# Altium PCB ESP32-C3 DEV-M-1.PcbDoc
Units mil, origin at the board's own origin, x right, y up, seen from the top; angles counter-clockwise.
Board outline 1550 x 1000 mil, 2 copper layers (Top Layer, Bottom Layer), stack 38.548 mil thick; 61 components, 45 nets, 260 pads, 137 vias.
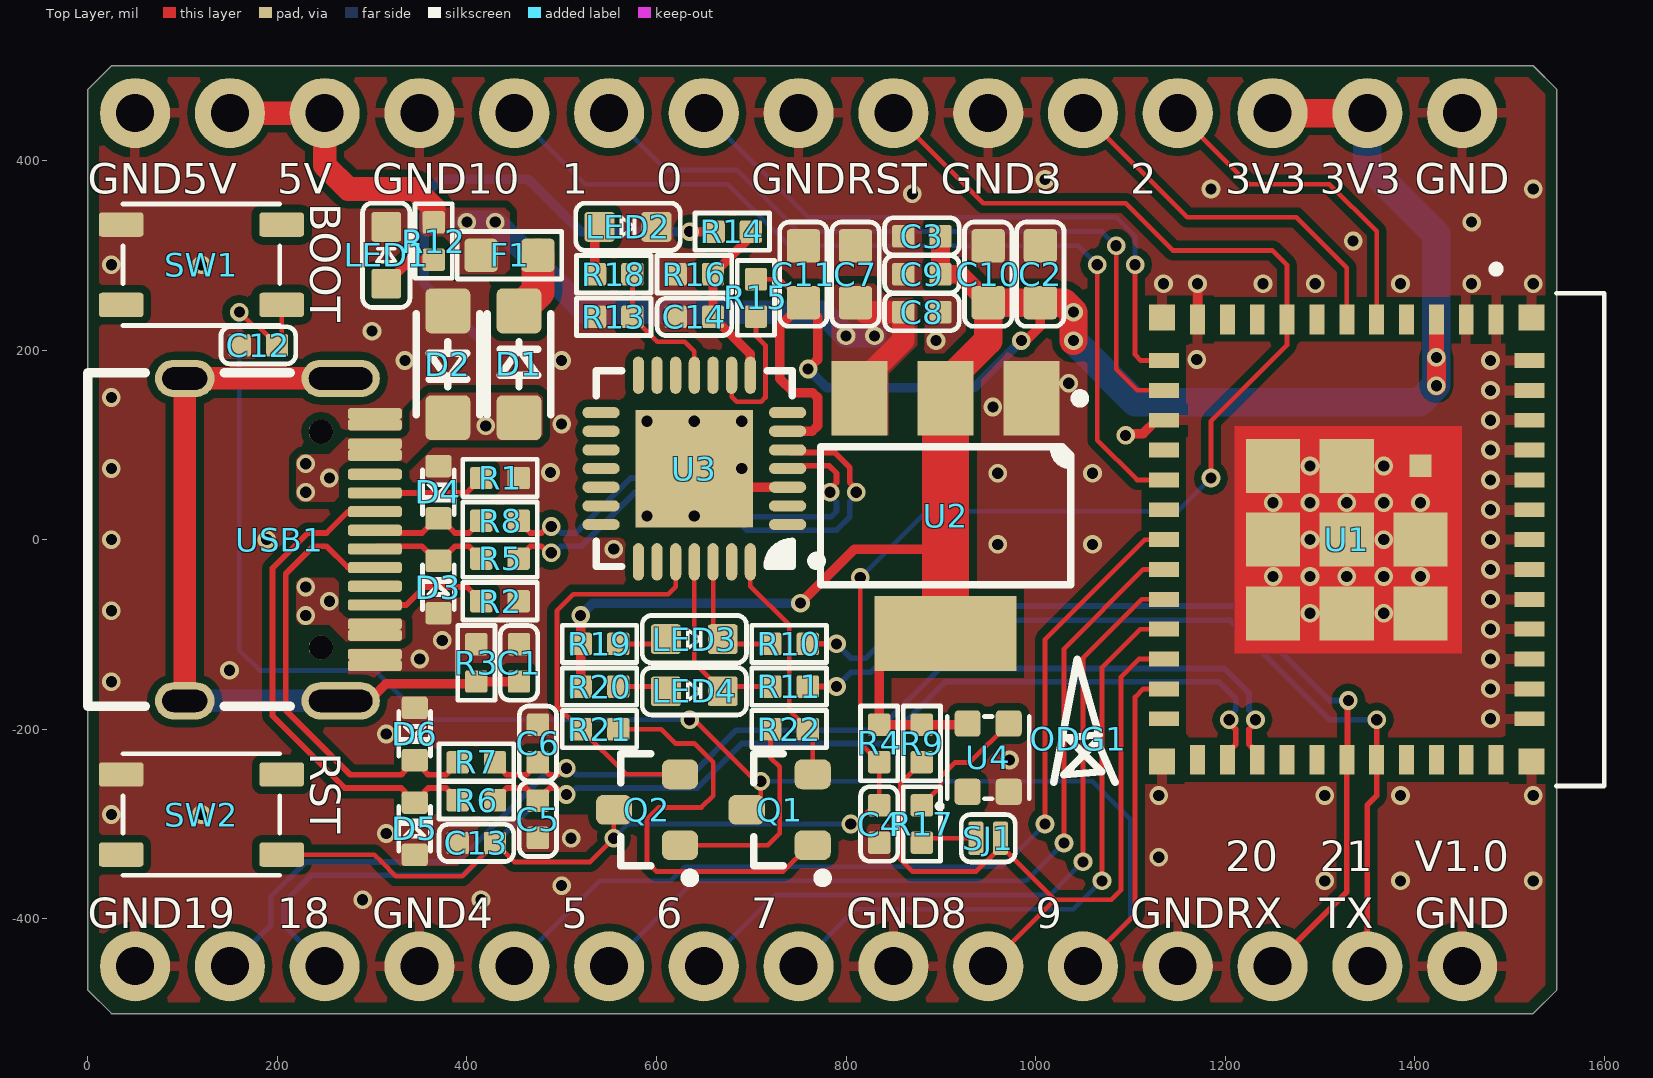
[diagram p0: Top Layer view]
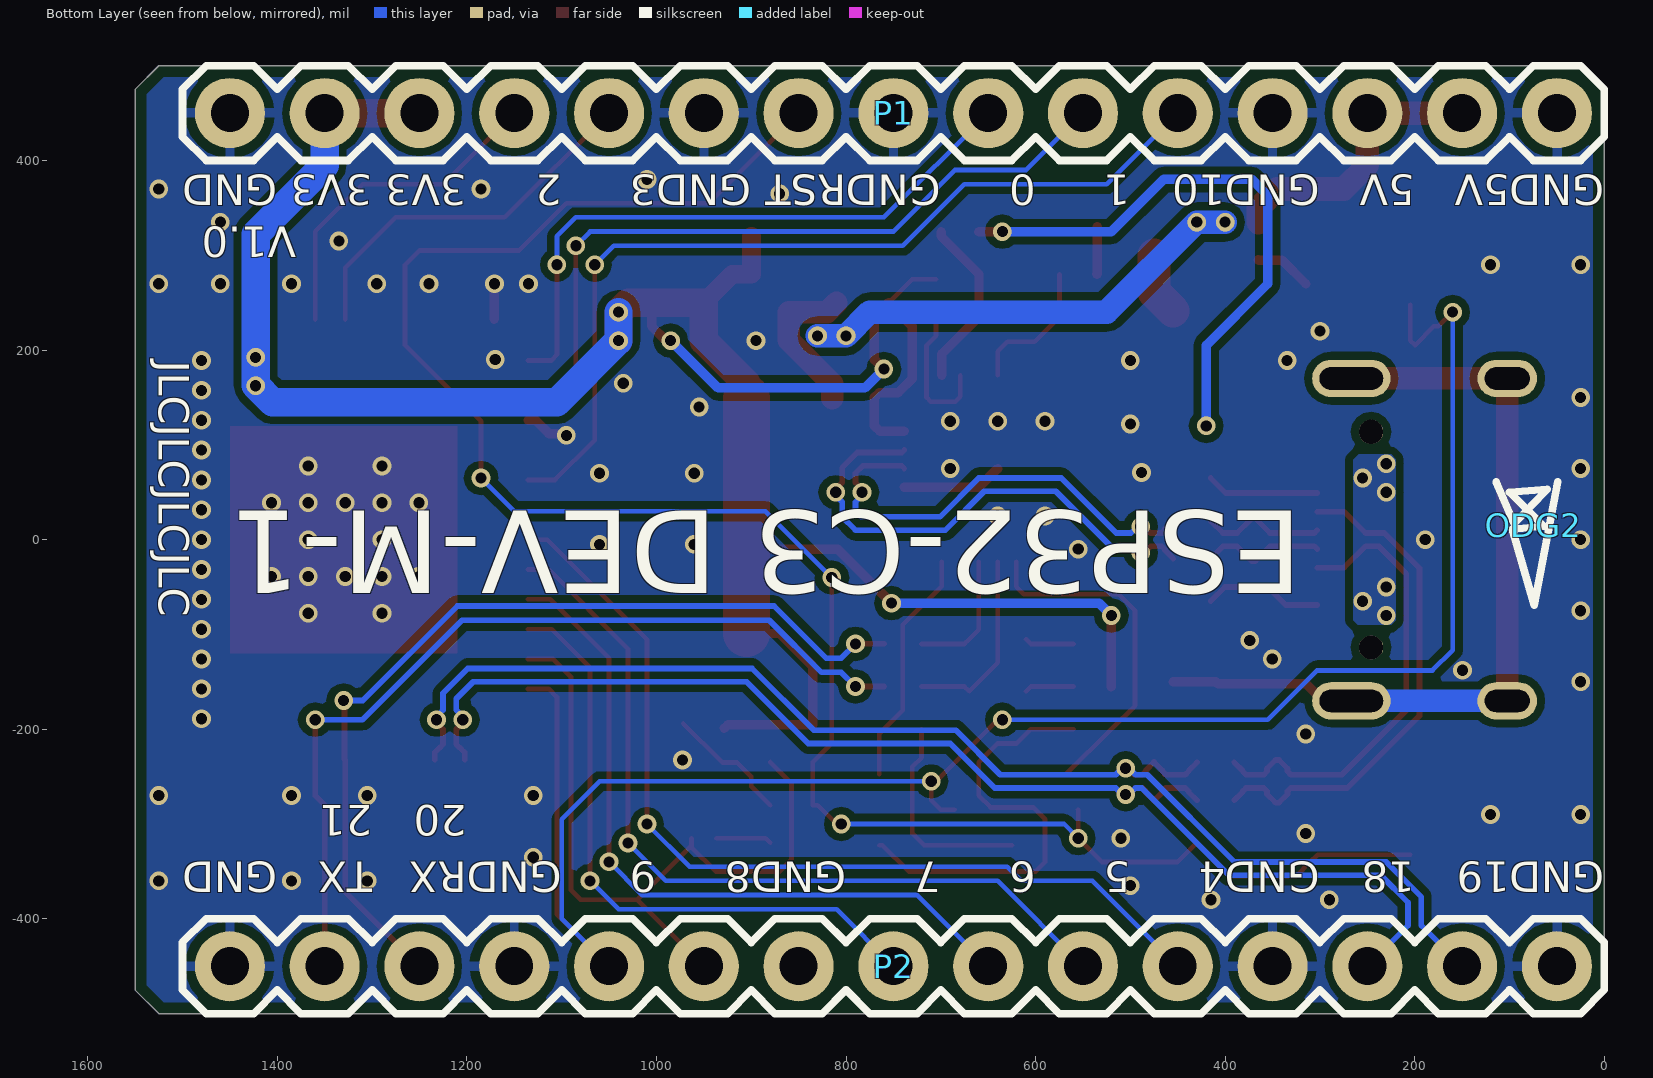
[diagram p1: Bottom Layer view, seen from below]

## Layer stack, top to bottom
Top Solder: solder mask 0.4, Solder Resist, Dk 3.5
Top Layer: signal copper 1.4
Dielectric 1: dielectric 35.748, FR-4, Dk 4.8
Bottom Layer: signal copper 1.4
Bottom Solder: solder mask 0.4, Solder Resist, Dk 3.5

## Board outline
0,-475 25,-500 1525,-500 1550,-475 1550,475 1525,500 25,500 0,475

## Design rules (kind name [scope] priority, off if disabled: settings)
BoardOutlineClearance [All] p1: gap=0 ignorepadtopadclearanceinfootprint=FALSE except(11.81: Poly-OutlineEdge Poly-CavityEdge Poly-CutoutEdge Poly-SplitBarrior Poly-SplitContinuation)
Clearance [All] p1: gap=8 ignorepadtopadclearanceinfootprint=FALSE except(0: Arc-Hole Track-Hole SMDPad-Hole THPad-Hole Via-Hole Fill-Hole Poly-Hole Region-Hole Text-Hole; 5: Arc-Arc Arc-Track Arc-SMDPad Arc-THPad Arc-Text Track-Track Track-SMDPad Track-THPad Track-Text SMDPad-SMDPad SMDPad-THPad SMDPad-Text THPad-THPad THPad-Text Via-Text Fill-Text Poly-Text Region-Text Text-Text; 7: Arc-Via Track-Via)
DiffPairsRouting [All] p1: maxlimit=100 minlimit=8 mostfreqgap=8 toplayer_minwidth=6 toplayer_maxwidth=6 toplayer_prefwidth=6 bottomlayer_minwidth=6 bottomlayer_maxwidth=6 bottomlayer_prefwidth=6 maxuncoupledlength=500
HoleSize [All] p1: absolutevalues=TRUE maxlimit=196.85 minlimit=11.81 maxpercent=80.000 minpercent=20.000
MinimumSolderMaskSliver [All] p1: minsoldermaskwidth=0
PlaneClearance [All] p1: clearance=10
PlaneConnect [All] p1: planeconnectstyle=Direct reliefexpansion=20 reliefentries=4 reliefconductorwidth=10 reliefairgap=10
PolygonConnect PolygonConnect_ESP [HasFootprint('XCVR_ESP32-C3-MINI-1U-N4')] p1: connectstyle=Relief reliefconductorwidth=10 reliefentries=4 polygonreliefangle="90 Angle" airgapwidth=10
PolygonConnect [All] p2: thpad.connectstyle=Relief thpad.reliefconductorwidth=10 thpad.reliefentries=4 thpad.polygonreliefangle="90 Angle" thpad.airgapwidth=10 smdpad.connectstyle=Direct smdpad.reliefconductorwidth=10 smdpad.reliefentries=4 smdpad.polygonreliefangle="90 Angle" smdpad.airgapwidth=10 via.connectstyle=Direct via.reliefconductorwidth=10 via.reliefentries=4 via.polygonreliefangle="90 Angle" via.airgapwidth=10
RoutingVias [All] p1: holewidth=11.81 width=19.68 viastyle="Through Hole" minholewidth=11.81 minwidth=19.68 maxholewidth=196.85 maxwidth=208.66
SilkToSilkClearance [All] p1: silktosilkclearance=0
SilkToSolderMaskClearance [IsPad] p1: minsilkscreentomaskgap=0 clearancetoexposedcopper=TRUE
SolderMaskExpansion [All] p1: expansion=2
Width [All] p1: maxlimit=100 minlimit=5 preferedwidth=5
23 further rules are at their usual default settings.

## Classes and differential pairs
differential pair USB2: +USB2_P -USB2_N
differential pair USB1: +USB1_P -USB1_N
differential pair Bx: +Bx_P -Bx_N
differential pair Ax: +Ax_P -Ax_N

## Components (designator, comment, footprint, x,y, rotation, side; value= is the part's Value field where it differs from the comment)
C1 "4.7nF" C0402 455,-130 r90 top
C2 "10uF/10V(10%)" C0603 1005,280 r270 top
C3 "1uF/16V(10%)" C0402 880,320 r0 top
C4 "1uF/16V(10%)" C0402 835,-300 r90 top
C5 "22pF/50V(5%)" C0402 475,-295 r90 top
C6 "22pF/50V(5%)" C0402 475,-215 r270 top
C7 "10uF/10V(10%)" C0603 810,280 r270 top
C8 "0.1uF/50V(10%)" C0402 880,240 r180 top
C9 "0.1uF/50V(10%)" C0402 880,280 r0 top
C10 "10uF/10V(10%)" C0603 950,280 r270 top
C11 "10uF/10V(10%)" C0603 755,280 r270 top
C12 "0.1uF/50V(10%)" C0402 180,205 r180 top
C13 "0.1uF/50V(10%)" C0402 410,-320 r180 top
C14 "1uF/16V(10%)" C0402 640,235 r0 top
D1 "DSK16" SOD123F 455,185 r90 top
D2 "SMF5.0A" SOD123F 380,185 r270 top
D3 "ESD5B5.05T1G" SOD-523 370,-50 r90 top
D4 "ESD5B5.05T1G" SOD-523 370,50 r270 top
D5 "ESD5B5.05T1G" SOD-523 345,-305 r90 top
D6 "ESD5B5.05T1G" SOD-523 345,-205 r270 top
F1 "6V/0.5A/1A" FUSE0603_0.5MM 445,300 r180 top
LED1 "LED" LED0603_RED 315,300 r90 top value=color?
LED2 "LED" LED0603_RED 570,330 r0 top value=color?
LED3 "LED" LED0603_RED 640,-105 r0 top value=color?
LED4 "LED" LED0603_RED 640,-160 r0 top value=color?
ODG1 "ODG_LOGO" ODG_LOGO 1045,-210 r0 top
ODG2 "ODG_LOGO" ODG_LOGO 75,15 r0 bottom
P1 "CONN_X15" 2.54MM_MALE_X15 1450,450 r180 bottom
P2 "CONN_X15" 2.54MM_MALE_X15 1450,-450 r180 bottom
Q1 "S8050" "INFINEON SOT-23-3" 730,-285 r180 top
Q2 "S8050" "INFINEON SOT-23-3" 590,-285 r180 top
R1 "5.1K(1%)" R0402 435,65 r180 top
R2 "5.1K(1%)" R0402 435,-65 r0 top
R3 "1M" R0402 410,-130 r90 top
R4 "10K(1%)" R0402 835,-215 r90 top
R5 "22R(1%)" R0402 435,-20 r180 top
R6 "22R(1%)" R0402 410,-275 r180 top
R7 "22R(1%)" R0402 410,-235 r180 top
R8 "22R(1%)" R0402 435,20 r180 top
R9 "10K(1%)" R0402 880,-215 r90 top
R10 "22R(1%)" R0402 740,-110 r180 top
R11 "22R(1%)" R0402 740,-155 r180 top
R12 "5.1K(1%)" R0402 365,315 r90 top
R13 "10K(1%)(NC)" R0402 555,235 r0 top
R14 "22K(1%)" R0402 680,325 r180 top
R15 "1K(1%)" R0402 705,255 r270 top
R16 "47K(1%)" R0402 640,280 r0 top
R17 "0R(1%)" R0402 880,-300 r90 top
R18 "3.3K(1%)" R0402 555,280 r0 top
R19 "3.3K(1%)" R0402 540,-110 r180 top
R20 "3.3K(1%)" R0402 540,-155 r180 top
R21 "5.1K(1%)" R0402 540,-200 r180 top
R22 "5.1K(1%)" R0402 740,-200 r180 top
SJ1 "SJ_2P" SJ_2P_MINI 950,-315 r0 top
SW1 "Button-4P" SWITCH_3X4X2.5_4PIN_SMD 120,290 r0 top
SW2 "Button-4P" SWITCH_3X4X2.5_4PIN_SMD 120,-290 r0 top
U1 "ESP32-C3-MINI-1U-N4 (A)" XCVR_ESP32-C3-MINI-1U-N4 1328.35,0 r270 top locked
U2 "AMS1117-3.3" "TI SOT-223 DCY" 905,25 r270 top
U3 "CP2102-GMR" QFN-28_EP 640,75 r180 top locked value=Value
U4 "WS2812" WS2812_2020 950,-230 r90 top
USB1 "Type-C" Type-C-TOP 0,0 r180 top locked

## Footprints (in the part's own frame and the unit in brackets; to place one, negate y for a bottom-side part, rotate by r counter-clockwise, add the part's x,y. Pads: shape width x height; smd on the part's side, far side on the other; paste and mask are expansions set on the pad)
2.54MM_MALE_X15 [mil]
  round 74 hole 40: 1(0,0) 2(100,0) 3(200,0) 4(300,0) 5(400,0) 6(500,0) 7(600,0) 8(700,0) 9(800,0) 10(900,0) 11(1000,0) 12(1100,0) 13(1200,0) 14(1300,0) 15(1400,0)
  silkscreen extent -50,-50 1450,50
C0402 [mm]
  rrect20% 0.6x0.6 smd: 1(-0.5,0) 2(0.5,0)
  silkscreen extent -1,-0.5 1,0.5, body extent -0.5,-0.26 0.5,0.26, height 0.52
C0603 [mil]
  rrect20% 35x35 smd: 1(-30,0) 2(30,0)
  silkscreen extent -55,-25 55,25, body extent -31,-16 32,16, height 32
FUSE0603_0.5MM [mil]
  rrect25% 35x35 smd: 1(-30,0) 2(30,0)
  silkscreen extent -55,-25 55,25, body extent -30,-17 30,17, height 23
"INFINEON SOT-23-3" [mm] "SOT23, 3-Leads, Body 2.90x2.40mm, Pitch 0.95mm, IPC Medium Density"
  rrect50% 0.972x0.802 smd: 1(-0.885,0.95) 2(-0.885,-0.95) 3(0.885,0)
  silkscreen extent -1.28,-1.5 0.7,1.95, body extent -1.16,-1.45 1.16,1.45, height 1
LED0603_RED [mm] "Chip Diode, 2-Leads, Body 1.60x0.80mm, IPC Medium Density"
  rrect20% 0.8x0.8 smd: 1(-0.762,0) 2(0.762,0)
  silkscreen extent -1.4,-0.64 1.4,0.64, body extent -0.8,-0.4 0.8,0.4, height 0.53
ODG_LOGO [mil]
  silkscreen extent -26,-46 39,84
QFN-28_EP [mm]
  oval 1x0.3 smd: 1(-2.5,1.5) 2(-2.5,1) 3(-2.5,0.5) 4(-2.5,0) 5(-2.5,-0.5) 6(-2.5,-1) 7(-2.5,-1.5) 15(2.5,-1.5) 16(2.5,-1) 17(2.5,-0.5) 18(2.5,0) 19(2.5,0.5) 20(2.5,1) 21(2.5,1.5)
  oval 0.3x1 smd: 8(-1.5,-2.5) 9(-1,-2.5) 10(-0.5,-2.5) 11(0,-2.5) 12(0.5,-2.5) 13(1,-2.5) 14(1.5,-2.5) 22(1.5,2.5) 23(1,2.5) 24(0.5,2.5) 25(0,2.5) 26(-0.5,2.5) 27(-1,2.5) 28(-1.5,2.5)
  rect 3.15x3.15 smd: 29(0,0)
  silkscreen extent -3.4,-2.63 2.63,2.63, body extent -2.5,-2.5 2.5,2.5, height 1
R0402 [mm]
  rrect20% 0.6x0.6 smd: 1(-0.5,0) 2(0.5,0)
  silkscreen extent -1,-0.5 1,0.5, body extent -0.5,-0.25 0.5,0.25, height 0.35
SJ_2P_MINI [mil]
  rrect30% 16x35 smd: 1(-13,0) 2(13,0)
  silkscreen extent -28,-25 28,25
SOD123F [mm] "SODFL, 2-Leads, Body 1.60x3.50mm, IPC Medium Density"
  rrect25% 1.2x1.2 smd: 1(-1.43,0) 2(1.43,0)
  silkscreen extent -1.35,-0.85 1.35,0.85, body extent -1.75,-0.8 1.75,0.8, height 1.1
SOD-523 [mm]
  rrect25% 0.6x0.7 smd: 1(-0.7,0) 2(0.7,0)
  silkscreen extent -0.6,-0.43 0.6,0.43, body extent -0.8,-0.4 0.8,0.4, height 0.82
SWITCH_3X4X2.5_4PIN_SMD [mm]
  rrect25% 1.2x0.65 smd: 1(-2.15,1.075) 2(2.15,1.075) 3(-2.15,-1.075) 4(2.15,-1.075)
  silkscreen extent -2.1,-1.63 2.1,1.63, body extent -2.55,-1.6 2.55,1.6, height 2.5
"TI SOT-223 DCY" [mm] "SOT223, 4-Leads, Body 6.50x7.00mm (avg), Pitch 2.30mm, IPC Medium Density"
  rect 2x1.5 smd: 1(-3.15,2.3) 2(-3.15,0) 3(-3.15,-2.3)
  rect 2x3.8 smd: 4(3.15,0)
  silkscreen extent -3.27,-3.35 1.85,3.73, body extent -3.52,-3.25 3.5,3.25, height 1.8
Type-C-TOP [mm]
  round 0.65 hole 0.65: 0(-6.25,-2.89) 0(-6.25,2.89)
  oval 1.6x1 hole 0.6 slot 1.2 at 0 deg: 1(-2.6,4.32) 2(-2.6,-4.32)
  oval 2.1x1 hole 0.6 slot 1.7 at 0 deg: 3(-6.78,-4.32) 4(-6.78,4.32)
  rrect50% 1.45x0.3 smd: A1(-7.695,-3.375) A4(-7.695,-2.562) A5(-7.695,-1.25) A6(-7.695,-0.25) A7(-7.695,0.25) A8(-7.695,1.25) A9(-7.695,2.562) A12(-7.695,3.375) B1(-7.695,3.075) B4(-7.695,2.262) B5(-7.695,1.75) B6(-7.695,0.75) B7(-7.695,-0.75) B8(-7.695,-1.75) B9(-7.695,-2.262) B12(-7.695,-3.075)
  silkscreen extent -5.43,-4.47 0,4.47, body extent -7.9,-4.47 0,4.47, height 3.16
WS2812_2020 [mm]
  rrect30% 0.7x0.7 smd: 1(-0.915,0.55) 2(-0.915,-0.55) 3(0.915,-0.55) 4(0.915,0.55)
  silkscreen extent -1.37,-1.1 1.1,1.37, body extent -1.1,-1 1.1,1, height 0.56
XCVR_ESP32-C3-MINI-1U-N4 [mm]
  rect 0.8x0.4 smd: 1(-5.9,4) 2(-5.9,3.2) 3(-5.9,2.4) 4(-5.9,1.6) 5(-5.9,0.8) 6(-5.9,0) 7(-5.9,-0.8) 8(-5.9,-1.6) 9(-5.9,-2.4) 10(-5.9,-3.2) 11(-5.9,-4) 25(5.9,-4) 26(5.9,-3.2) 27(5.9,-2.4) 28(5.9,-1.6) 29(5.9,-0.8) 30(5.9,0) 31(5.9,0.8) 32(5.9,1.6) 33(5.9,2.4) 34(5.9,3.2) 35(5.9,4)
  rect 0.4x0.8 smd: 12(-4.8,-4.9) 13(-4,-4.9) 14(-3.2,-4.9) 15(-2.4,-4.9) 16(-1.6,-4.9) 17(-0.8,-4.9) 18(0,-4.9) 19(0.8,-4.9) 20(1.6,-4.9) 21(2.4,-4.9) 22(3.2,-4.9) 23(4,-4.9) 24(4.8,-4.9) 36(4.8,4.9) 37(4,4.9) 38(3.2,4.9) 39(2.4,4.9) 40(1.6,4.9) 41(0.8,4.9) 42(0,4.9) 43(-0.8,4.9) 44(-1.6,4.9) 45(-2.4,4.9) 46(-3.2,4.9) 47(-4,4.9) 48(-4.8,4.9)
  rect 0.6x0.6 smd paste-1 mask+0: 49(-1.975,1.975)
  rect 1.45x1.45 smd: 49(-1.975,0) 49(-1.975,-1.975) 49(0,1.975) 49(0,0) 49(0,-1.975) 49(1.975,1.975) 49(1.975,0) 49(1.975,-1.975)
  rect 0.7x0.7 smd: 50(-5.95,4.95) 51(-5.95,-4.95) 52(5.95,-4.95) 53(5.95,4.95)
  Top Layer region: -1.25,1.25 -2.7,1.25 -2.7,2.1 -2.1,2.7 -1.25,2.7
  silkscreen extent -7.35,3.9 6.6,6.9, body extent -6.6,-5.62 6.6,6.89, height 2.55

## Part data
C1 C2 C3 C4 C5 C6 C7 C8 C9 C10 C11 C12 C13 C14: library part CAP, "Capacitor"
D1: library part DIODE, "二极管"
D2: library part TVS_U, "极性：Unidirectional", Package="DFN1006L Taiwan Semiconductor", Check_prices=https://www.snapeda.com/parts/TESD5V0L1UC%20RJG/Taiwan+Semiconductor/view-part/?ref=eda, Digi-Key_Part_Number=TESD5V0L1UCRJGTR-ND, MF="Taiwan Semiconductor Corporation", MP="TESD5V0L1UC RJG", Purchase-URL="https://pricing.snapeda.com/search/part/TESD5V0L1UC RJG/?ref=eda", SnapEDA_Link=https://www.snapeda.com/parts/TESD5V0L1UC%20RJG/Taiwan+Semiconductor/view-part/?ref=snap
D3 D4 D5 D6: library part TVS_BI, "极性：Bidirectional", Package="DFN1006L Taiwan Semiconductor", Check_prices=https://www.snapeda.com/parts/TESD5V0L1UC%20RJG/Taiwan+Semiconductor/view-part/?ref=eda, Digi-Key_Part_Number=TESD5V0L1UCRJGTR-ND, MF="Taiwan Semiconductor Corporation", MP="TESD5V0L1UC RJG", Purchase-URL="https://pricing.snapeda.com/search/part/TESD5V0L1UC RJG/?ref=eda", SnapEDA_Link=https://www.snapeda.com/parts/TESD5V0L1UC%20RJG/Taiwan+Semiconductor/view-part/?ref=snap
F1: library part FUSE, "贴片自恢复保险丝"
Q1 Q2: library part NPN, "NPN型"
R1 R2 R3 R4 R5 R6 R7 R8 R9 R10 R11 R12 R13 R14 R15 R16 R17 R18 R19 R20 R21 R22: library part RES, "Resistor"
SJ1: "焊接跳线"
SW1 SW2: "Button"
U1: "Bluetooth, WiFi 802.11b/g/n, Bluetooth v5.0 Transceiver Module 2.412GHz ~ 2.484GHz Antenna Not Included, I-PEX Rev3 Surface Mount", Package=None, Check_prices=https://www.snapeda.com/parts/ESP32-C3-MINI-1U-N4/Espressif+Systems/view-part/?ref=eda, Digi-Key_Part_Number=1965-ESP32-C3-MINI-1U-N4TR-ND, MF="Espressif Systems", MP=ESP32-C3-MINI-1U-N4, Purchase-URL=https://pricing.snapeda.com/search/part/ESP32-C3-MINI-1U-N4/?ref=eda, SnapEDA_Link=https://www.snapeda.com/parts/ESP32-C3-MINI-1U-N4/Espressif+Systems/view-part/?ref=snap
U2: library part AMS1117, "线性稳压芯片"
U3: library part "CP2102 QFN28 (A)", "USBתTTL", PART NUMBER=CP2102, MFG #1="SILICON LABS", PART DESC="SINGLE-CHIP USB TO UART BRIDGE, QFN28, RoHS.", RefDes=RefDes, Type=DEV
USB1: library part USB-Type-C_16P

## Via types
v1: diameter 19.68, hole 11.81, Top Layer to Bottom Layer, tented both sides, 137 vias

## Nets (pads, with @x,y where several pads share a name; then routed paths per layer and width w, separated by ;. In a path a pad name is that pad's centre, name@x,y a point inside that pad or via, vN(x,y) a via of type N, cw(c..) or ccw(c..) an arc to the next point about the centre after c; other vN are vias at no path point)
Ax_N: D3.2 R5.2 USB1.A7 | length 131.7
  Top Layer w6: USB1.A7 305.8,-7 352.59,-7 368.03,-22.44 D3.2 371.97,-22.44 387.41,-7 402.32,-7 R5.2
Ax_P: D4.2 R8.2 USB1.A6 | length 131.7
  Top Layer w6: USB1.A6 305.8,7 352.59,7 368.03,22.44 D4.2 371.97,22.44 387.41,7 402.32,7 R8.2
Bx_N: D5.2 R6.2 USB1.B7 | length 537.4
  Top Layer w6: USB1.B7 274.53,29.53 252,7 232.2,7 195,-30.2 195,-185.78 271.22,-262 330.71,-262 334.22,-265.51 334.22,-268.63 343.03,-277.44 D5.2 346.97,-277.44 355.78,-268.63 355.78,-265.51 359.29,-262 377.99,-262 381.5,-265.51 381.5,-266.19 R6.2
Bx_P: D6.2 R7.2 USB1.B6 | length 491
  Top Layer w6: USB1.B6 274.53,-29.53 252,-7 238,-7 209,-36 209,-179.98 277.02,-248 330.71,-248 334.22,-244.49 334.22,-241.37 343.03,-232.56 D6.2 346.97,-232.56 355.78,-241.37 355.78,-244.49 359.29,-248 377.99,-248 381.5,-244.49 381.5,-243.81 R7.2
CHIP_PU: C4.2 C13.1 P1.7 Q2.3 R4.1 SW2.4 U1.8 | length 2119.5
  Top Layer w5: SW2.4 302.36,-332.32 310.04,-340 ; 310.04,-340.04 325,-355 395,-355 430,-320 450,-340 530,-340 v1(555,-315) 555,-284.84 Q2.3 ; v1(805,-300) 810,-300 829.68,-280.32 C4.2 R4.1 815,-214.68 v1(815,-40) ; P1.7 945,355 1095,355 1145,305 1250,305 1265.35,289.65 U1.8 1265.35,205.35 1185,125 v1(1185,65)
  Bottom Layer w5: v1(555,-315) 570,-300 v1(805,-300) ; v1(815,-40) 885,30 1150,30 v1(1185,65)
DTR: Q1.2 R22.1 U3.28 | length 251.4
  Top Layer w5: U3.28 699.06,-49.06 740,-90 740,-180 764.84,-204.84 Q1.2
GND: C1.2 C2.1 C3.1 C4.1 C5.1 C6.1 C7.1 C8.1 C9.1 C10.1 C11.1 C12.2 C13.2 C14.1 D2.1 D3.1 D4.1 D5.1 D6.1 LED1.2 LED2.2 P1.1 P1.6 P1.8 P1.12 P1.15 P2.1 P2.4 P2.7 P2.12 P2.15 R1.1 R2.2 R3.2 R13.1 R16.1 SW1.1 SW2.1 U1.1 U1.2 U1.11 U1.14 U1.36 U1.37 U1.38 U1.39 U1.40 U1.41 U1.42 U1.43 U1.44 U1.45 U1.46 U1.47 U1.48 U1.49 U1.50 U1.51 U1.52 U1.53 U2.1 U3.3 U3.29 U4.2 USB1.A1 USB1.A12 USB1.B1 USB1.B12 | length 269.1
  Top Layer w10: U3.29 659.69,55.31 U3.3 ; v1(1095,110) 1096.85,111.85 1113.43,111.85 1127.56,125.98 U1.14 ; U1.11 v1(1170.87,270) ; U1.49@1328.35,0 U1.49@1328.35,77.76
  other v1: 290,-380 415,-380 500,-365 1305,-360 1385,-360 1525,-360 1130,-335 510,-315 315,-310 25,-290 120,-290 1130,-270 1305,-270 1385,-270 1525,-270 972.5,-232.5 315,-205 1480,-188.98 1480,-157.48 25,-150 149.61,-137.8 350.39,-125.98 1480,-125.98 374.02,-106.3 1480,-94.49 1289.47,-77.76 1367.22,-77.76 25,-75 1480,-62.99 1250.59,-38.88 1289.47,-38.88 1328.35,-38.88 1367.22,-38.88 1406.1,-38.88 1480,-31.5 555,-10 960,-5 1060,-5 25,0 188.98,0 1289.47,0 1367.22,0 1480,0 590,25 640,25 1480,31.5 1250.59,38.88 1289.47,38.88 1328.35,38.88 1367.22,38.88 1406.1,38.88 1480,62.99 960,70 1060,70 488.19,70.87 25,75 690,75 1289.47,77.76 1367.22,77.76 1480,94.49 500,122.05 590,125 640,125 690,125 1480,125.98 955,140 25,150 1480,157.48 1035,165 334.65,188.98 500,188.98 1480,188.98 1170,190 895,210 300,220 1135,270 1240,270 1295,270 1385,270 1460,270 1525,270 25,290 120,290 1335,315 1460,335 870,365 1185,370 1525,370 1010,380
GPIO0: P1.9 U1.12 | length 666.8
  Top Layer w5: v1(1105,290) 1105,195 1111.02,188.98 U1.12
  Bottom Layer w5: P1.9 760,340 1085,340 1105,320 v1(1105,290)
GPIO1: P1.10 U1.13 | length 782.8
  Top Layer w5: v1(1085,310) 1085,180 1107.52,157.48 U1.13
  Bottom Layer w5: P1.10 610,390 685,390 750,325 1070,325 v1(1085,310)
GPIO2: P1.4 U1.5 | length 354.4
  Top Layer w5: P1.4 1225,375 1310,375 1359.84,325.16 U1.5
GPIO3: P1.5 U1.6 | length 400.4
  Top Layer w5: P1.5 1160,340 1275,340 1328.35,286.65 U1.6
GPIO4: P2.11 U1.18 | length 986.1
  Top Layer w5: v1(1010,-300) 1010,-105 1115,0 U1.18
  Bottom Layer w5: P2.11 540,-360 615,-360 630,-345 965,-345 v1(1010,-300)
GPIO5: P2.10 U1.19 | length 878.9
  Top Layer w5: v1(1030,-320) 1030,-115 1113.5,-31.5 U1.19
  Bottom Layer w5: P2.10 640,-360 990,-360 v1(1030,-320)
GPIO6: P2.9 U1.20 | length 771.7
  Top Layer w5: v1(1050,-340) 1050,-125 1112.01,-62.99 U1.20
  Bottom Layer w5: P2.9 725,-375 1015,-375 v1(1050,-340)
GPIO7: P2.8 U1.21 | length 664.5
  Top Layer w5: v1(1070,-360) 1070,-135 1110.51,-94.49 U1.21
  Bottom Layer w5: P2.8 810,-390 1040,-390 v1(1070,-360)
GPIO8: P2.6 R9.1 SJ1.2 U1.22 | length 773.4
  Top Layer w5: R9.1 857.5,-257.18 857.5,-337.5 870,-350 937.5,-350 SJ1.2@963,-324.5 ; P2.6 1020,-380 ; SJ1.2 963,-323 1020,-380 ; U1.22 1109.02,-125.98 1090,-145 1090,-370 1080,-380 1020,-380
GPIO9: C12.1 P2.5 Q1.3 SW1.4 U1.23 | length 2034.9
  Top Layer w5: v1(160,240) 175,225 179.68,225 C12.1 204.65,209.96 SW1.4 ; v1(635,-190) 640,-190 705,-255 v1(710,-255) 710,-275 700,-285 Q1.3 Q1.3@685.16,-285 ; P2.5 1105,-395 1105,-166.04 1113.56,-157.48 U1.23
  Bottom Layer w5: v1(160,240) 160,-116.69 181.31,-138 303,-138 355,-190 v1(635,-190) ; v1(710,-255) 1060,-255 1100,-295 1100,-400 P2.5
GPIO10: P1.11 U1.16 | length 954.1
  Top Layer w5: v1(1065,290) 1065,105 1107.01,62.99 U1.16
  Bottom Layer w5: P1.11 525,375 675,375 740,310 1045,310 v1(1065,290)
NetC1_1: C1.1 R3.1 USB1.1 USB1.2 USB1.3 USB1.4 | length 865.8
  Top Layer w10: USB1.4 296.53,-170.08 314.61,-152 407.68,-152 R3.1 C1.1
  Top Layer w23.62: USB1.1 USB1.2 USB1.3
  Bottom Layer w23.62: USB1.1 USB1.4
NetC14_2: C14.2 R14.1 R16.2 U3.8 | length 184.3
  Top Layer w10: C14.2 R16.2 699.68,320 R14.1 ; C14.2@660,235 699.06,195.94 U3.8
NetD1_2: D1.2 F1.1 | length 67
  Top Layer w35: D1.2 475,261.3 F1.1
NetLED1_1: LED1.1 R12.1 | length 60.5
  Top Layer w10: LED1.1 339.89,294.89 364.58,294.89 R12.1
NetLED2_1: LED2.1 R18.1 | length 50.1
  Top Layer w10: LED2.1@535,330 535.16,329.84 535.16,280.16 R18.1
NetLED3_1: LED3.1 R19.1 | length 52.4
  Top Layer w5: R19.1 605,-110 LED3.1
NetLED3_2: LED3.2 R10.2 U3.26 | length 138.1
  Top Layer w5: U3.26@660.04,-23.43 660.04,-95.04 LED3.2 675,-110 R10.2
NetLED4_1: LED4.1 R20.1 | length 52.4
  Top Layer w5: R20.1 605,-155 LED4.1
NetLED4_2: LED4.2 R11.2 U3.25 | length 201.4
  Top Layer w5: U3.25 640,-130 LED4.2 675,-155 R11.2
NetQ1_1: Q1.1 R21.1 | length 465.3
  Top Layer w5: R21.1@560,-200 605,-200 620,-215 640,-215 660,-235 660,-270 647.5,-282.5 602.5,-282.5 590,-295 590,-340 600,-350 733.9,-350 761.5,-322.4 Q1.1
NetQ2_1: Q2.1 R22.2 | length 224.3
  Top Layer w5: Q2.1 717.6,-322.4 730,-310 730,-239.68 720.32,-230 R22.2
NetR1_2: R1.2 USB1.A5 | length 118.9
  Top Layer w6: USB1.A5 399.53,49.21 R1.2
NetR2_1: R2.1 USB1.B5 | length 126.4
  Top Layer w6: USB1.B5 336.1,-68.9 355,-50 400.32,-50 R2.1
NetR13_2: R13.2 R18.2 U3.11 | length 150.6
  Top Layer w5: R18.2 R13.2 601.02,208.66 629.92,208.66 640,198.58 U3.11
NetR15_2: R15.2 U3.9 | length 152
  Top Layer w5: U3.9 679.37,150.63 684.66,145.34 710.34,145.34 715,150 715,205 705,215 R15.2
NetR17_1: R17.1 SJ1.1 | length 58.9
  Top Layer w5: R17.1 884.68,-315 SJ1.1
RGB_CTRL: R17.2 U4.3 | length 133.5
  Top Layer w5: R17.2 900,-260.32 900,-250 915,-235 930.63,-235 U4.3
RTS: Q2.2 R21.2 U3.24 | length 422
  Top Layer w5: U3.24 620.32,-49.68 612.34,-57.66 512.34,-57.66 495,-75 495,-175 520,-200 R21.2 567.91,-247.6 Q2.2
U0RXD: P2.3 R10.1 U1.30 | length 954
  Top Layer w6: R10.1 v1(790,-110) ; P2.3 1328.35,-371.65 U1.30 1329.17,-231.46 1329.17,-170.6 v1(1330,-169.77)
  Bottom Layer w6: v1(790,-110) 805,-125 820.94,-125 875.94,-70 1210,-70 1309.77,-169.77 v1(1330,-169.77)
U0TXD: P2.2 R11.1 U1.31 | length 936.9
  Top Layer w6: R11.1 v1(790,-155) ; P2.2 1350,-280 1359.84,-270.16 U1.31 1359.92,-232.2 1359.92,-190.08 v1(1360,-190)
  Bottom Layer w6: v1(790,-155) 805,-140 825.94,-140 880.94,-85 1205,-85 1310,-190 v1(1360,-190)
USB1_N: R5.1 U3.5 | length 538.6
  Top Layer w6: R5.1 463.5,-11.19 463.5,-10.51 467.01,-7 478.71,-7 485.56,-13.84 v1(489.07,-13.84) ; U3.5 741.27,91.84 788.16,91.84 804,76 804,60.28 810.84,53.43 v1(810.84,49.92)
  Bottom Layer w6: v1(489.07,-13.84) 492.59,-13.84 499.43,-7 520.67,-7 578.67,51 654.2,51 695.2,10 790,10 804,24 804,39.56 810.84,46.41 v1(810.84,49.92)
USB1_P: R8.1 U3.4 | length 492.2
  Top Layer w6: R8.1 463.5,11.19 463.5,10.51 467.01,7 478.71,7 485.56,13.84 v1(489.07,13.84) ; U3.4 741.27,77.84 782.36,77.84 790,70.2 790,60.28 783.16,53.43 v1(783.16,49.92)
  Bottom Layer w6: v1(489.07,13.84) 492.59,13.84 499.43,7 514.87,7 572.87,65 660,65 701,24 784.2,24 790,29.8 790,39.56 783.16,46.41 v1(783.16,49.92)
USB2_N: C5.2 P2.13 R6.1 U1.26 | length 1368.6
  Top Layer w6: R6.1 438.5,-266.19 438.5,-265.51 442.01,-262 462.67,-262 466.19,-265.51 466.19,-266.5 C5.2 483.81,-266.5 483.81,-265.51 487.33,-262 495,-262 501.84,-268.84 v1(505,-268.84) ; U1.26 1202.36,-224.41 1207.24,-219.54 1207.6,-219.54 1211.11,-216.02 1211.11,-200 1204.27,-193.16 v1(1204.27,-190)
  Bottom Layer w6: P2.13 207,-407 207,-382.8 235.8,-354 396,-354 488,-262 494.64,-262 501.49,-268.84 v1(505,-268.84) 508.51,-268.84 515.36,-262 643,-262 690,-215 839.8,-215 904.8,-150 1193.23,-150 1211.11,-167.88 1211.11,-179.64 1204.27,-186.49 v1(1204.27,-190)
USB2_P: C6.2 P2.14 R7.1 U1.27 | length 1415
  Top Layer w6: R7.1 438.5,-243.81 438.5,-244.49 442.01,-248 462.67,-248 466.19,-244.49 466.19,-243.5 C6.2 483.81,-243.5 483.81,-244.49 487.33,-248 495.81,-248 502.65,-241.16 v1(505,-241.16) ; v1(1231.95,-190) 1231.95,-193.16 1225.11,-200 1225.11,-216.02 1228.63,-219.54 1228.98,-219.54 1233.86,-224.41 U1.27
  Bottom Layer w6: P2.14 193,-407 193,-377 230,-340 390.2,-340 482.2,-248 494.64,-248 501.49,-241.16 v1(505,-241.16) 508.51,-241.16 515.36,-248 637.2,-248 684.2,-201 834,-201 899,-136 1199.03,-136 1225.11,-162.08 1225.11,-179.64 1231.95,-186.49 v1(1231.95,-190)
VBUS: D1.1 D2.2 R14.2 USB1.A4 USB1.A9 USB1.B4 USB1.B9 | length 604.8
  Top Layer w10: v1(635,325) R14.2@660,325
  Bottom Layer w10: v1(420,120) 420,205 355,270 355,363.16 371.84,380 465,380 520,325 v1(635,325)
  other v1: 230,-80 255,-65 230,-50 230,50 255,65 230,80
VCC_3V3: C2.2 C3.2 C9.2 C10.2 C11.2 P1.2 P1.3 R4.2 R9.2 R15.1 R19.2 R20.2 U1.3 U2.2 U2.4 U3.6 U4.4 | length 2907.4
  Top Layer w5: R15.1 730.32,274.68 C11.2
  Top Layer w10: v1(520,-80) 520,-109.68 R19.2 R20.2 ; U3.6 764.37,114.37 770,120 770,150 765,155 745,155 730,170 730,225 C11.2 770,235 770,190 v1(760,180) ; v1(751.97,-66.93) 808.9,-10 905,-10 ; U2.4 869.57,-99.02 835.2,-133.39 835.2,-195.12 R4.2 R9.2 924.69,-195.32 U4.4@928.35,-198.98 ; v1(985,210) 990,210 1005,225 C2.2
  Top Layer w15.75: v1(1422.83,192.28) U1.3
  Top Layer w20: C3.2 C9.2 920,280 C10.2 ; v1(1422.83,162.28) v1(1422.83,192.28)
  Top Layer w30: U2.2 905,165 950,210 C10.2 C2.2 1030,250 v1(1040,240) v1(1040,210) ; P1.3 P1.2
  Top Layer w50: U2.4 905,-10 U2.2
  Bottom Layer w10: v1(520,-80) 533.07,-66.93 v1(751.97,-66.93) ; v1(760,180) 780,160 935,160 v1(985,210)
  Bottom Layer w30: v1(1040,240) v1(1040,210) 1105,145 1405,145 1422.83,162.83 v1(1422.83,192.28) 1422.83,322.17 1350,395 P1.2
VCC_5V: C7.2 C8.2 F1.2 P1.13 P1.14 R12.2 U2.3 | length 948.1
  Top Layer w23.62: C7.2 820,240 C8.2 860.32,210.32 814.45,164.45 U2.3
  Top Layer w25: P1.14 P1.13 250,395 275,370 345,370 365,350 R12.2
  Bottom Layer w25: v1(400,335) v1(430,335) 525,240 775,240 v1(800,215) v1(830,215)
pads on no net: SW1.2 SW1.3 SW2.2 SW2.3 U1.4 U1.7 U1.9 U1.10 U1.15 U1.17 U1.24 U1.25 U1.28 U1.29 U1.32 U1.33 U1.34 U1.35 U3.1 U3.2 U3.7 U3.10 U3.12 U3.13 U3.14 U3.15 U3.16 U3.17 U3.18 U3.19 U3.20 U3.21 U3.22 U3.23 U3.27 U4.1 USB1.0 USB1.A8 USB1.B8

## Polygon pours and split planes (outlines as drawn)
no net on Bottom Layer "vcc-2" (solid, remove dead copper, pour order 62): 380,330
GND on Bottom Layer "vcc-2" (solid, remove dead copper, pour order 52): -100,600 -100,-600 1700,-600 1700,600
VBUS on Bottom Layer "vcc-2" (solid, remove dead copper, pour order 51): 260,-90 225,-90 220,-85 220,85 225,90 259.21,90 265,84.21 265,-85
no net on Bottom Layer "vcc-2" (solid, remove dead copper, pour order 50): 250,-45
no net on Bottom Layer "vcc-2" (solid, remove dead copper, pour order 45): 230,-50
no net on Bottom Layer "vcc-2" (solid, pour order 29): -1137.4,-938.28
no net on Bottom Layer "vcc-2" (solid, pour order 27): -1165,-930
VCC_5V on Top Layer "vcc-2" (solid, remove dead copper, pour order 22): 785,110 785,265 790,270 830,270 845,255 870,255 875,250 875,205 845,175 845,110
VCC_5V on Top Layer "vcc-2" (solid, remove dead copper, pour order 23): 350,345 350,325 355,320 375,320 385,310 385,285 390,280 440,280 445,285 445,345 440,350 355,350
GND on Top Layer "vcc-2" (solid, remove dead copper, pour order 60): -100,600 -100,-600 1700,-600 1700,600
VBUS on Top Layer "vcc-2" (solid, remove dead copper, pour order 58): 275.91,109.96 334.96,109.96 340,115 340,135 360,155 475,155 480,150 480,110 475,105 360.95,105 335.91,79.96 275.91,79.96
VBUS on Top Layer "vcc-2" (solid, remove dead copper, pour order 26): 335,80 270,80 265,75 265,45 260,40 225,40 220,45 220,85 225,90 255,90 275,110 335,110
VBUS on Top Layer "vcc-2" (solid, remove dead copper, pour order 25): 335,-80 270,-80 265,-75 265,-45 260,-40 225,-40 220,-45 220,-85 225,-90 255,-90 275,-110 335,-110
no net on Top Layer "vcc-2" (solid, remove dead copper, pour order 24): 335,-85

## Other copper
Top Layer:
  rectangle net GND: 1210,-120 1450,120
  pour cut-out: 219.09,-110 275,-110 275,-145 219.09,-145
  pour cut-out: 434.09,-220 530,-220 530,-290 434.09,-290
  pour cut-out: 715,150 715,0 565,0 565,150

## Silkscreen, mask and mechanical layers (free items; w line width, h text height)
Top Overlay:
  text "GND" at 0,365 h32
  text "5V" at 100,365 h32
  text "5V" at 200,365 h32
  text "GND" at 300,365 h32
  text "10" at 400,365 h32
  text "1" at 500,365 h32
  text "0" at 600,365 h32
  text "GND" at 700,365 h32
  text "RST" at 800,365 h32
  text "GND" at 900,365 h32
  text "3" at 1000,365 h32
  text "2" at 1100,365 h32
  text "3V3" at 1200,365 h32
  text "3V3" at 1300,365 h32
  text "GND" at 1400,365 h32
  text "BOOT" at 235,355 h32 r270
  text "RST" at 235,-225 h32 r270
  text "20" at 1200,-350 h32
  text "21" at 1300,-350 h32
  text "V1.0" at 1400,-350 h32
  text "GND" at 0,-410 h32
  text "19" at 100,-410 h32
  text "18" at 200,-410 h32
  text "GND" at 300,-410 h32
  text "4" at 400,-410 h32
  text "5" at 500,-410 h32
  text "6" at 600,-410 h32
  text "7" at 700,-410 h32
  text "GND" at 800,-410 h32
  text "8" at 900,-410 h32
  text "9" at 1000,-410 h32
  text "GND" at 1100,-410 h32
  text "RX" at 1200,-410 h32
  text "TX" at 1300,-410 h32
  text "GND" at 1400,-410 h32
Bottom Overlay:
  text "GND" at 0,385 h32 r180
  text "5V" at 100,385 h32 r180
  text "5V" at 200,385 h32 r180
  text "GND" at 300,385 h32 r180
  text "10" at 400,385 h32 r180
  text "1" at 500,385 h32 r180
  text "0" at 600,385 h32 r180
  text "GND" at 700,385 h32 r180
  text "RST" at 800,385 h32 r180
  text "GND" at 900,385 h32 r180
  text "3" at 1000,385 h32 r180
  text "2" at 1100,385 h32 r180
  text "3V3" at 1200,385 h32 r180
  text "3V3" at 1300,385 h32 r180
  text "GND" at 1400,385 h32 r180
  text "V1.0" at 1380,330 h32 r180
  text "JLCJLCJLCJLC" at 1525,188.98 h32 r90
  text "ESP32-C3 DEV-M-1" at 318.9,59.06 h149.61 r180
  text "20" at 1200,-280 h32 r180
  text "21" at 1300,-280 h32 r180
  text "GND" at 0,-340 h32 r180
  text "19" at 100,-340 h32 r180
  text "18" at 200,-340 h32 r180
  text "GND" at 300,-340 h32 r180
  text "4" at 400,-340 h32 r180
  text "5" at 500,-340 h32 r180
  text "6" at 600,-340 h32 r180
  text "7" at 700,-340 h32 r180
  text "GND" at 800,-340 h32 r180
  text "8" at 900,-340 h32 r180
  text "9" at 1000,-340 h32 r180
  text "GND" at 1100,-340 h32 r180
  text "RX" at 1200,-340 h32 r180
  text "TX" at 1300,-340 h32 r180
  text "GND" at 1400,-340 h32 r180
Mechanical 1:
  the board outline again, w8